# EAGLE board Motor-Controllers (EAGLE 8.6.0)
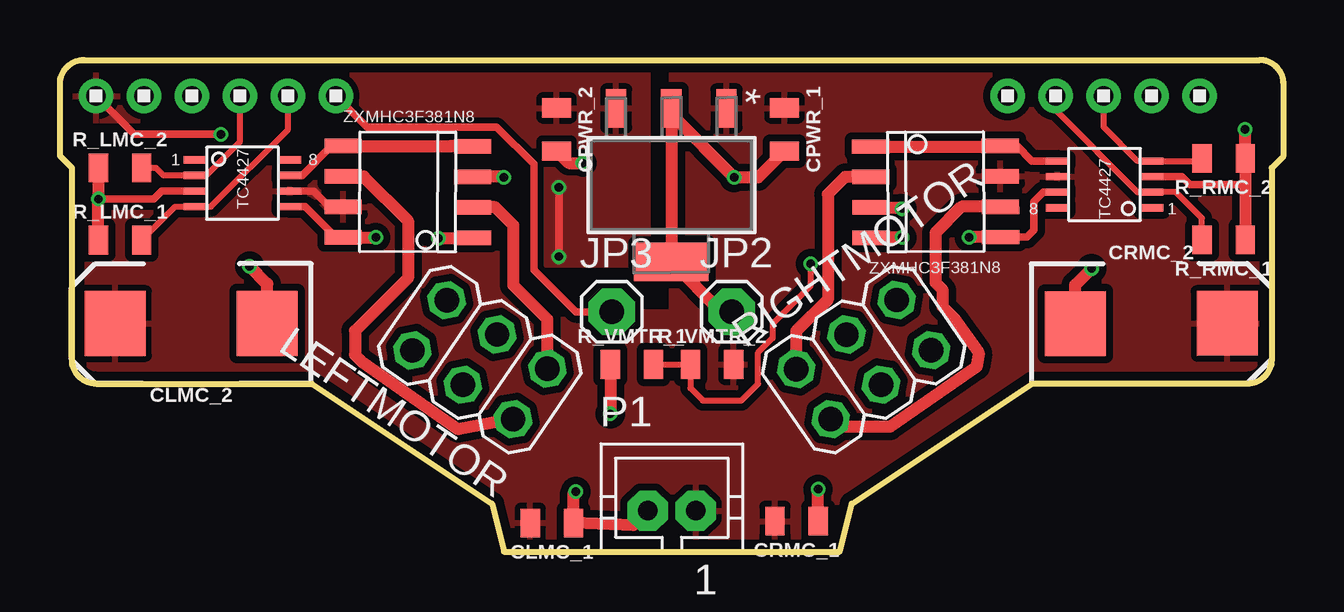
[diagram p0: board, top side]
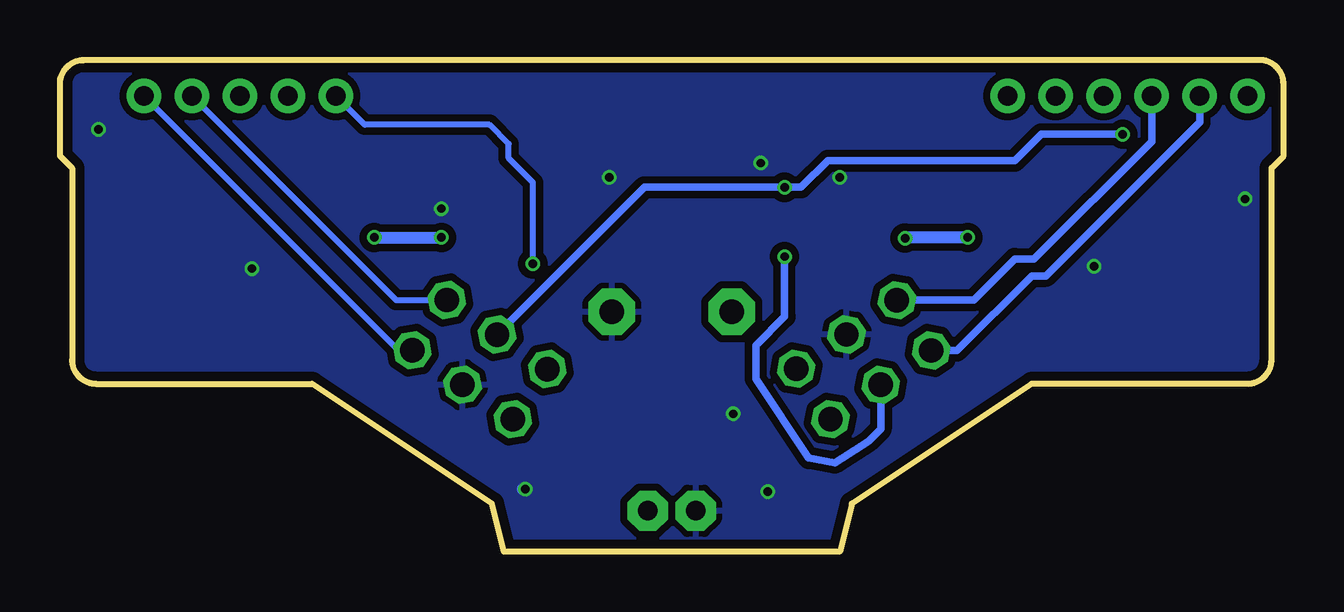
[diagram p1: board, bottom side, seen from below]

Size 51 x 20.5 mm. Coordinates in mm from the lower left corner, seen from the top.
Outline: 33,2 40.5,7 49.5,7 arc90 50.5,8 50.5,16 51,16.5 51,19.5 arc90 50,20.5 1,20.5 arc90 0,19.5 0,16.5 0.5,16 0.5,8 arc90 1.5,7 10.5,7 18,2 18.5,0 32.5,0 33,2
Copper layers (1*16): Top 0.035559375mm / dielectric 1.6mm / Bottom 0.035559375mm
Design rules "oshpark-2layer *": minimum track width 6mil, minimum drill 10mil, track to track 6mil, track to pad 6mil, pad to pad 6mil, via to via 6mil, smd to smd 6mil, copper to edge 15mil, drill to drill 6mil, minimum pad ring 5mil, minimum via ring 5mil, stop-mask expansion 2.5mil, vias tented up to drill 12mil, thermal gap 10mil

## Footprints (pad centres in the part's own frame; a part is rotated, then mirrored left to right if it is on the bottom)
1X1 = drill 0.8 pad 1.422: 1 0,0
0805 = smd 0.8 x 1.2: 1 -0.9,0; 2 0.9,0
EIA7343 = smd 2.55 x 2.7: A 3.17,0; C -3.17,0
1X01 = drill 1.016 pad 1.93 octagon: 1 0,0
2X03 = drill 1.016 octagon: 1 -2.54,-1.27; 2 -2.54,1.27; 3 0,-1.27; 4 0,1.27; 5 2.54,-1.27; 6 2.54,1.27
1X4 = drill 0.8 pad 1.422: 1 -3,0; 2 -1,0; 3 1,0; 4 3,0
JST-PH2 = drill 0.813 pad 1.676 octagon: 1 1,0; 2 -1,0
MP04A = smd 1.6 x 0.838: 1 -3.2,2.3; 2 -3.2,0; 3 -3.2,-2.3 | smd 1.6 x 3.099: 4 3.2,0
TC4427(8MSOP) = smd 0.95 x 0.3: GND -1.975,-0.325; IN_A -1.975,0.325; IN_B -1.975,-0.975; NC1 -1.975,0.975; NC2 1.975,0.975; OUT_A 1.975,0.325; OUT_B 1.975,-0.975; VDD 1.975,-0.325
ZXMHC3F381N8 = smd 0.6 x 1.55: N1D/P1D -0.635,-2.7; N1G -1.905,-2.7; N1S/N2S 0.635,-2.7; N2D/P2D 0.635,2.7; N2G 1.905,-2.7; P1G -1.905,2.7; P1S/P2S -0.635,2.7; P2G 1.905,2.7

## Placement (x,y rotation side)
5V  1X1  [1X1]  1.5,19 0 top
CLMC_1  0.33µF  [0805]  20.5,1.19 180 top
CLMC_2  100uF  [EIA7343]  5.47,9.51 180 top
CPWR_1  0.47µF  [0805]  30.2,17.6 270 top
CPWR_2  47µF  [0805]  20.7,17.6 270 top
CRMC_1  0.33µF  [0805]  30.7,1.27 180 top
CRMC_2  100uF  [EIA7343]  45.49,9.51 0.1 top
JP2  [1X01]  28,10 0 top
JP3  [1X01]  23,10 0 top
LEFTMOTOR  [2X03]  17.5,8 145.7 top
LM  1X4  [1X4]  6.5,19 0 top
P1  [JST-PH2]  25.5,1.7 0 top
R_LMC_1  47K  [0805]  2.5,12.99 0 top
R_LMC_2  47K  [0805]  2.5,16 0 top
R_RMC_1  0.75  [0805]  48.5,13 180 top
R_RMC_2  0.75  [0805]  48.5,16.4 180 top
R_VMTR_1  10K  [0805]  23.84,7.8 0 top
R_VMTR_2  20K  [0805]  27.18,7.8 0 top
REG1  LM2940IMP-5.0/NOPB  [MP04A]  25.48,15.28 270 top
RIGHTMOTOR  [2X03]  33.5,8 34.5 top
RM  1X4  [1X4]  44.5,19 0 top
U$1  1X1  [1X1]  39.5,19 0 top
U$2  1X1  [1X1]  11.5,19 0 top
U$15  TC4427(8MSOP)  [TC4427(8MSOP)]  7.61,15.36 0 top
U$16  ZXMHC3F381N8  [ZXMHC3F381N8]  14.5,15 89.9 top
U$17  TC4427(8MSOP)  [TC4427(8MSOP)]  43.54,15.31 180 top
U$18  ZXMHC3F381N8  [ZXMHC3F381N8]  36.5,15 270.3 top

## Library data of the parts
5V LM RM U$1 U$2 = headers(2mm)
CLMC_1 CPWR_1 CPWR_2 CRMC_1 = SparkFun-Capacitors; PROD_ID: CAP-08469
CLMC_2 CRMC_2 = SparkFun-Capacitors; PROD_ID: CAP-07890
JP2 JP3 = adafruit
LEFTMOTOR RIGHTMOTOR = pinhead
P1 = jst-ph
R_LMC_1 R_LMC_2 R_RMC_1 R_RMC_2 R_VMTR_1 R_VMTR_2 = SparkFun-Resistors; PROD_ID: RES-08474
REG1 = LM2940IMP-5.0; 3D_LIBRARY_NAME: National_LDO; BASE_PN: LM2940; COMP: TypeLDO; COPYRIGHT: Copyright C 2015 Accelerated Designs. All rights reserved; LIBRARY: ReferenceLM2940IMP; MANUFACTURER_PART_NUMBER: LM2940IMP5.0NOPB; PIN: Count4; SYMBOL: NameLM2940IMP50; TYPE: LM2940IMP5.0; VENDOR: National Semiconductor; VERSION: 1
U$15 U$17 = TC4427(8MSOP)
U$16 U$18 = ZXMHC3F381N8

## Nets
5V: 5V.1 CPWR_2.1 LEFTMOTOR.4 REG1.3 RIGHTMOTOR.4
FANPWM: JP3.1 U$2.1
GND: CLMC_1.1 CLMC_2.C CPWR_1.2 CPWR_2.2 CRMC_1.1 CRMC_2.C JP2.1 LEFTMOTOR.3 P1.2 R_LMC_1.1 R_LMC_2.1 R_RMC_1.1 R_RMC_2.1 R_VMTR_1.1 REG1.2 REG1.4 RIGHTMOTOR.3 U$15.GND U$16.N1S/N2S U$17.GND U$18.N1S/N2S
L: LEFTMOTOR.1 U$16.N1D/P1D
LENCA: LEFTMOTOR.6 LM.1
LENCB: LEFTMOTOR.5 LM.2
LPWMA: LM.4 R_LMC_1.2 U$15.IN_B
LPWMB: LM.3 R_LMC_2.2 U$15.IN_A
N$28: LEFTMOTOR.2 U$16.N2D/P2D
N$33: U$17.OUT_A U$18.N2G U$18.P2G
N$34: U$17.OUT_B U$18.N1G U$18.P1G
N$36: RIGHTMOTOR.1 U$18.N2D/P2D
OUT_A: U$15.OUT_B U$16.N1G U$16.P1G
OUT_B: U$15.OUT_A U$16.N2G U$16.P2G
R: RIGHTMOTOR.2 U$18.N1D/P1D
RENCA: RIGHTMOTOR.6 RM.3
RENCB: RIGHTMOTOR.5 RM.4
RPWMA: R_RMC_1.2 RM.1 U$17.IN_A
RPWMB: R_RMC_2.2 RM.2 U$17.IN_B
VBAT: CLMC_1.2 CLMC_2.A CPWR_1.1 CRMC_1.2 CRMC_2.A P1.1 R_VMTR_2.2 REG1.1 U$15.VDD U$16.P1S/P2S U$17.VDD U$18.P1S/P2S
VMTR: R_VMTR_1.2 R_VMTR_2.1 U$1.1

## Tracks (layer width: path | path; a pad name or v marks a point on that pad's centre or on a via)
5V  (via drill 0.35)
  Top 0.305: v6.7,17.4 3.1,17.4 5V.1 | v20.8,12.3 v20.8,15.19
  Bottom 0.254: LEFTMOTOR.4
  Bottom 0.305: LEFTMOTOR.4 16.79,5.11 17.3,4.6 18.7,3.7 19.8,3.9 22,7.2 22,8.6 20.8,9.8 v20.8,12.3 | RIGHTMOTOR.4 | v6.7,17.4 10.1,17.4 11.2,16.3 19,16.3 20.11,15.19 v20.8,15.19 26.64,15.19 RIGHTMOTOR.4
  pour Top (isolate 0.254): 19.92,15.97 19.92,12.05 19.96,12.01 20.01,11.96 24.52,11.96 24.52,21.98 24.5,22 -0.5,22 -0.5,18 10.5,18 10.5,17 19.5,17 19.92,16.58 19.92,15.98
FANPWM
  Top 0.305: U$2.1 12.8,17.7 18.2,17.7 19.75,16.15 19.75,11.75 21.5,10 JP3.1
GND  (via drill 0.35)
  Top 0.305: U$15.GND 4.23,15.04 3.9,14.7 v1.6,14.7 | U$17.GND 46.77,15.64 47.1,15.3 49.4,15.3
  Top 0.508: R_LMC_2.1 v1.6,14.7 R_LMC_1.1 | CRMC_2.C 42.32,11.12 v43,11.8 | R_RMC_2.1 49.49,16.49 | R_RMC_2.1 49.4,15.3 R_RMC_1.1 | 18.47,15.63 v18.5,15.6 18.47,15.63 | U$18.N1S/N2S 35.05,14.35 v35.1,14.3 | 25.48,12.12 REG1.2 25.48,18.22 v28.1,15.6 29.1,15.6 CPWR_1.2 | 25.48,12.12 25.5,12.1 | 17.67,15.63 17.7,15.6 | CLMC_2.C 8.64,11.16 v7.9,11.9 | 18.47,15.63 U$16.N1S/N2S 17.67,15.63 | 17.67,15.63 | JP2.1 27.56,10 REG1.4 25.48,12.12 | CPWR_2.2 21.2,16.2 v21.8,16.2 | R_VMTR_1.1 v22.94,5.74 | P1.2 23.9,1.1 CLMC_1.1 21.4,2.4 v21.5,2.5 | CRMC_1.1 v31.6,2.6 | R_RMC_2.1 v49.4,17.6
  Bottom 0.508: v31.6,2.6 31.7,2.6
  pour Bottom (isolate 0.305): -7.5,26 -7.5,-5 59.5,-5 59.5,26
L
  Top 0.508: U$16.N1D/P1D 18.14,14.36 18.9,13.6 18.9,11.1 20.32,9.68 LEFTMOTOR.1
LENCA
  Bottom 0.305: LEFTMOTOR.6 13.62,8.39 10.5,11.5 9.9,11.5 3.5,17.9 LM.1
LENCB
  Bottom 0.254: LEFTMOTOR.5
  Bottom 0.305: LEFTMOTOR.5 12.92,10.48 11.2,12.2 10.4,12.2 5.5,17.1 LM.2
LPWMA
  Top 0.254: R_LMC_1.2 4.8,14.39 U$15.IN_B 6.28,14.39 9.5,17.6 LM.4
LPWMB
  Top 0.254: R_LMC_2.2 4,16 4.31,15.68 U$15.IN_A 6.09,15.68 7.5,17.1 LM.3
N$28
  Top 0.254: LEFTMOTOR.2
  Top 0.508: U$16.N2D/P2D 12.66,15.64 14.5,13.8 14.5,11.4 12.3,9.2 12.3,8.2 12.6,7.9 16.6,5.1 LEFTMOTOR.2 | U$16.N2D/P2D
N$33  (via drill 0.35)
  Top 0.305: U$17.OUT_A 40.98,14.98 40.6,14.6 40.6,13.4 40.31,13.11 U$18.P2G
  Top 0.508: U$18.P2G v37.91,13.11 v37.9,13.1 | v35.1,13.1 33.83,13.1 U$18.N2G
  Bottom 0.508: v37.9,13.1 v35.1,13.1
N$34
  Top 0.305: U$17.OUT_B 40.52,16.29 39.88,16.92 U$18.P1G
  Top 0.508: U$18.N1G 39.16,16.89 U$18.P1G
N$36
  Top 0.508: U$18.N2D/P2D 37.58,14.38 36.5,13.3 36.5,11.2 36.8,10.9 36.8,10.2 37.3,9.7 38.3,8.3 38.2,7.7 34.6,5.2 32.45,5.2 RIGHTMOTOR.1 | RIGHTMOTOR.1
OUT_A  (via drill 0.35)
  Top 0.305: U$15.OUT_B 10.22,14.39 11.5,13.1 U$16.P1G
  Top 0.508: U$16.P1G v13.16,13.1 | v15.77,13.07 17.17,13.07 U$16.N1G | U$16.P1G
  Bottom 0.508: v13.16,13.1 15.74,13.1 v15.77,13.07
OUT_B
  Top 0.254: U$16.N2G
  Top 0.305: U$15.OUT_A 10.09,15.68 11.31,16.91 U$16.P2G | U$16.P2G
  Top 0.508: U$16.P2G 16.3,16.91 16.31,16.9 U$16.N2G
R
  Top 0.508: U$18.N1D/P1D 32.72,15.62 32,14.9 32,10.5 30.69,9.19 RIGHTMOTOR.2 | RIGHTMOTOR.2
RENCA
  Bottom 0.254: RM.3 36.99,10.49 RIGHTMOTOR.6 | RIGHTMOTOR.6
RENCB
  Bottom 0.254: RM.4 36.89,8.39 RIGHTMOTOR.5
RPWMA
  Top 0.254: R_RMC_1.2 47.6,13.9 46.52,14.98 U$17.IN_A 44.92,14.98 41.5,18.4 RM.1
RPWMB
  Top 0.254: RM.2 43.5,17.7 44.92,16.29 U$17.IN_B 47.48,16.29 R_RMC_2.2
VBAT
  Top 0.305: U$15.VDD 10.56,15.04 11.23,14.37 U$16.P1S/P2S
  pour Top (isolate 0.305): 19.5,10 25.5,10 25.5,21 56.5,21 57.5,20 57.5,0 53.5,-4 -0.5,-4 -3.5,-1 -3.6,16 19.5,16
VMTR  (via drill 0.35)
  Top 0.254: R_VMTR_1.2 R_VMTR_2.1 26.28,6.82 26.8,6.3 28.4,6.3 29.1,7 29.1,8.3 29.7,8.9 29.7,9.5 31.3,11.1 v31.3,11.99 v31.29,12
  Bottom 0.254: v31.29,12 31.29,15.39 32.3,16.4 32.3,17 33.1,17.8 38.3,17.8 U$1.1